# Altium PCB ABS.PcbDoc
Units mil, origin at the board's own origin, x right, y up, seen from the top; angles counter-clockwise.
Board outline 2450 x 2365 mil, 2 copper layers (Top Layer, Bottom Layer); 13 components, 11 nets, 48 pads, 0 vias.
Unrouted connection lines stored in the file: 1.
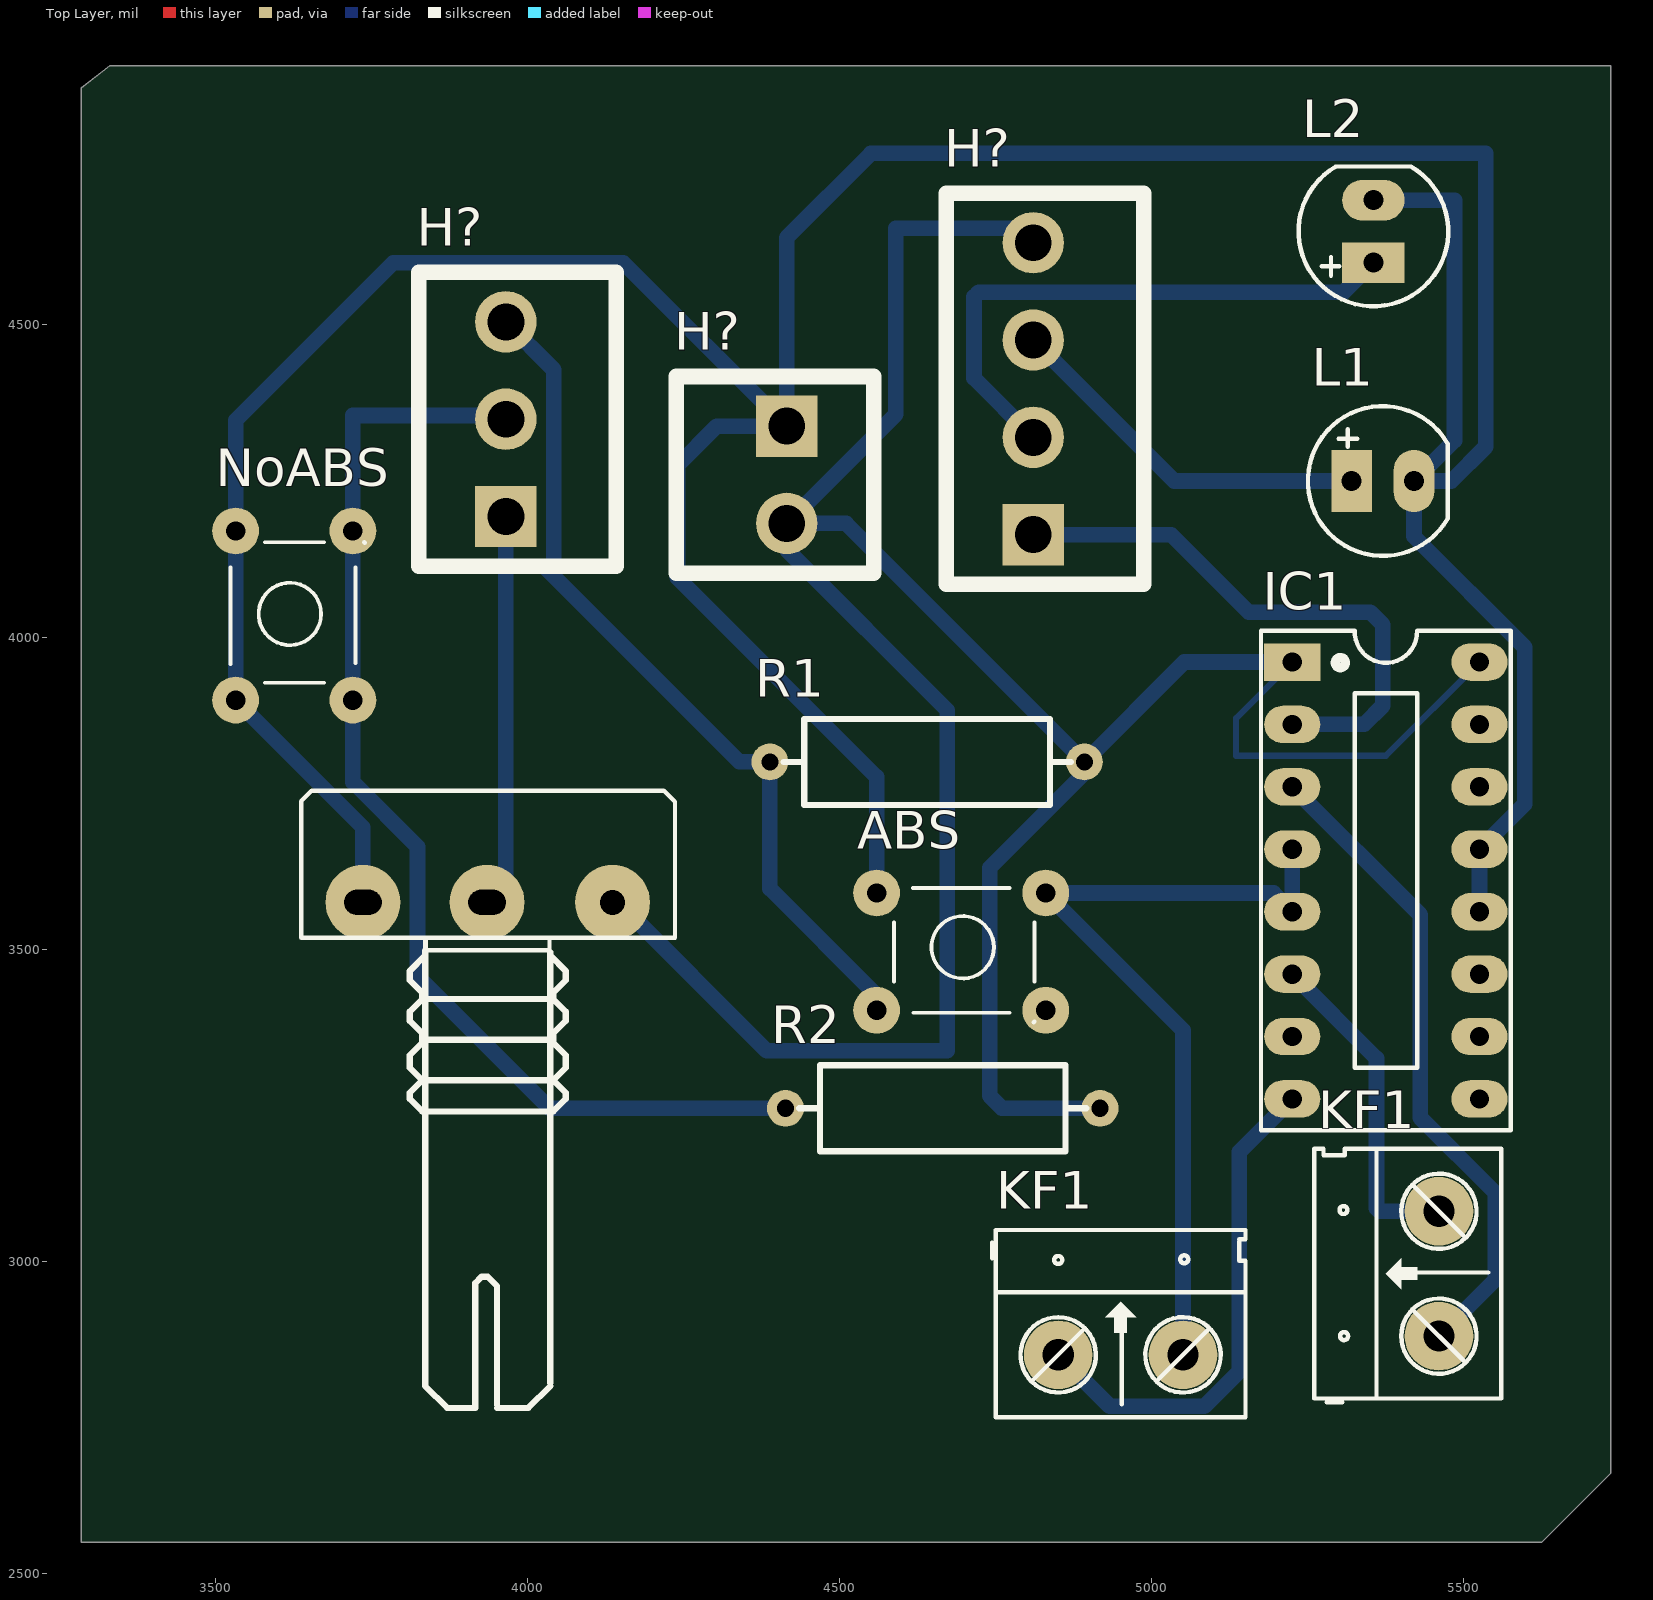
[diagram p0: Top Layer view]
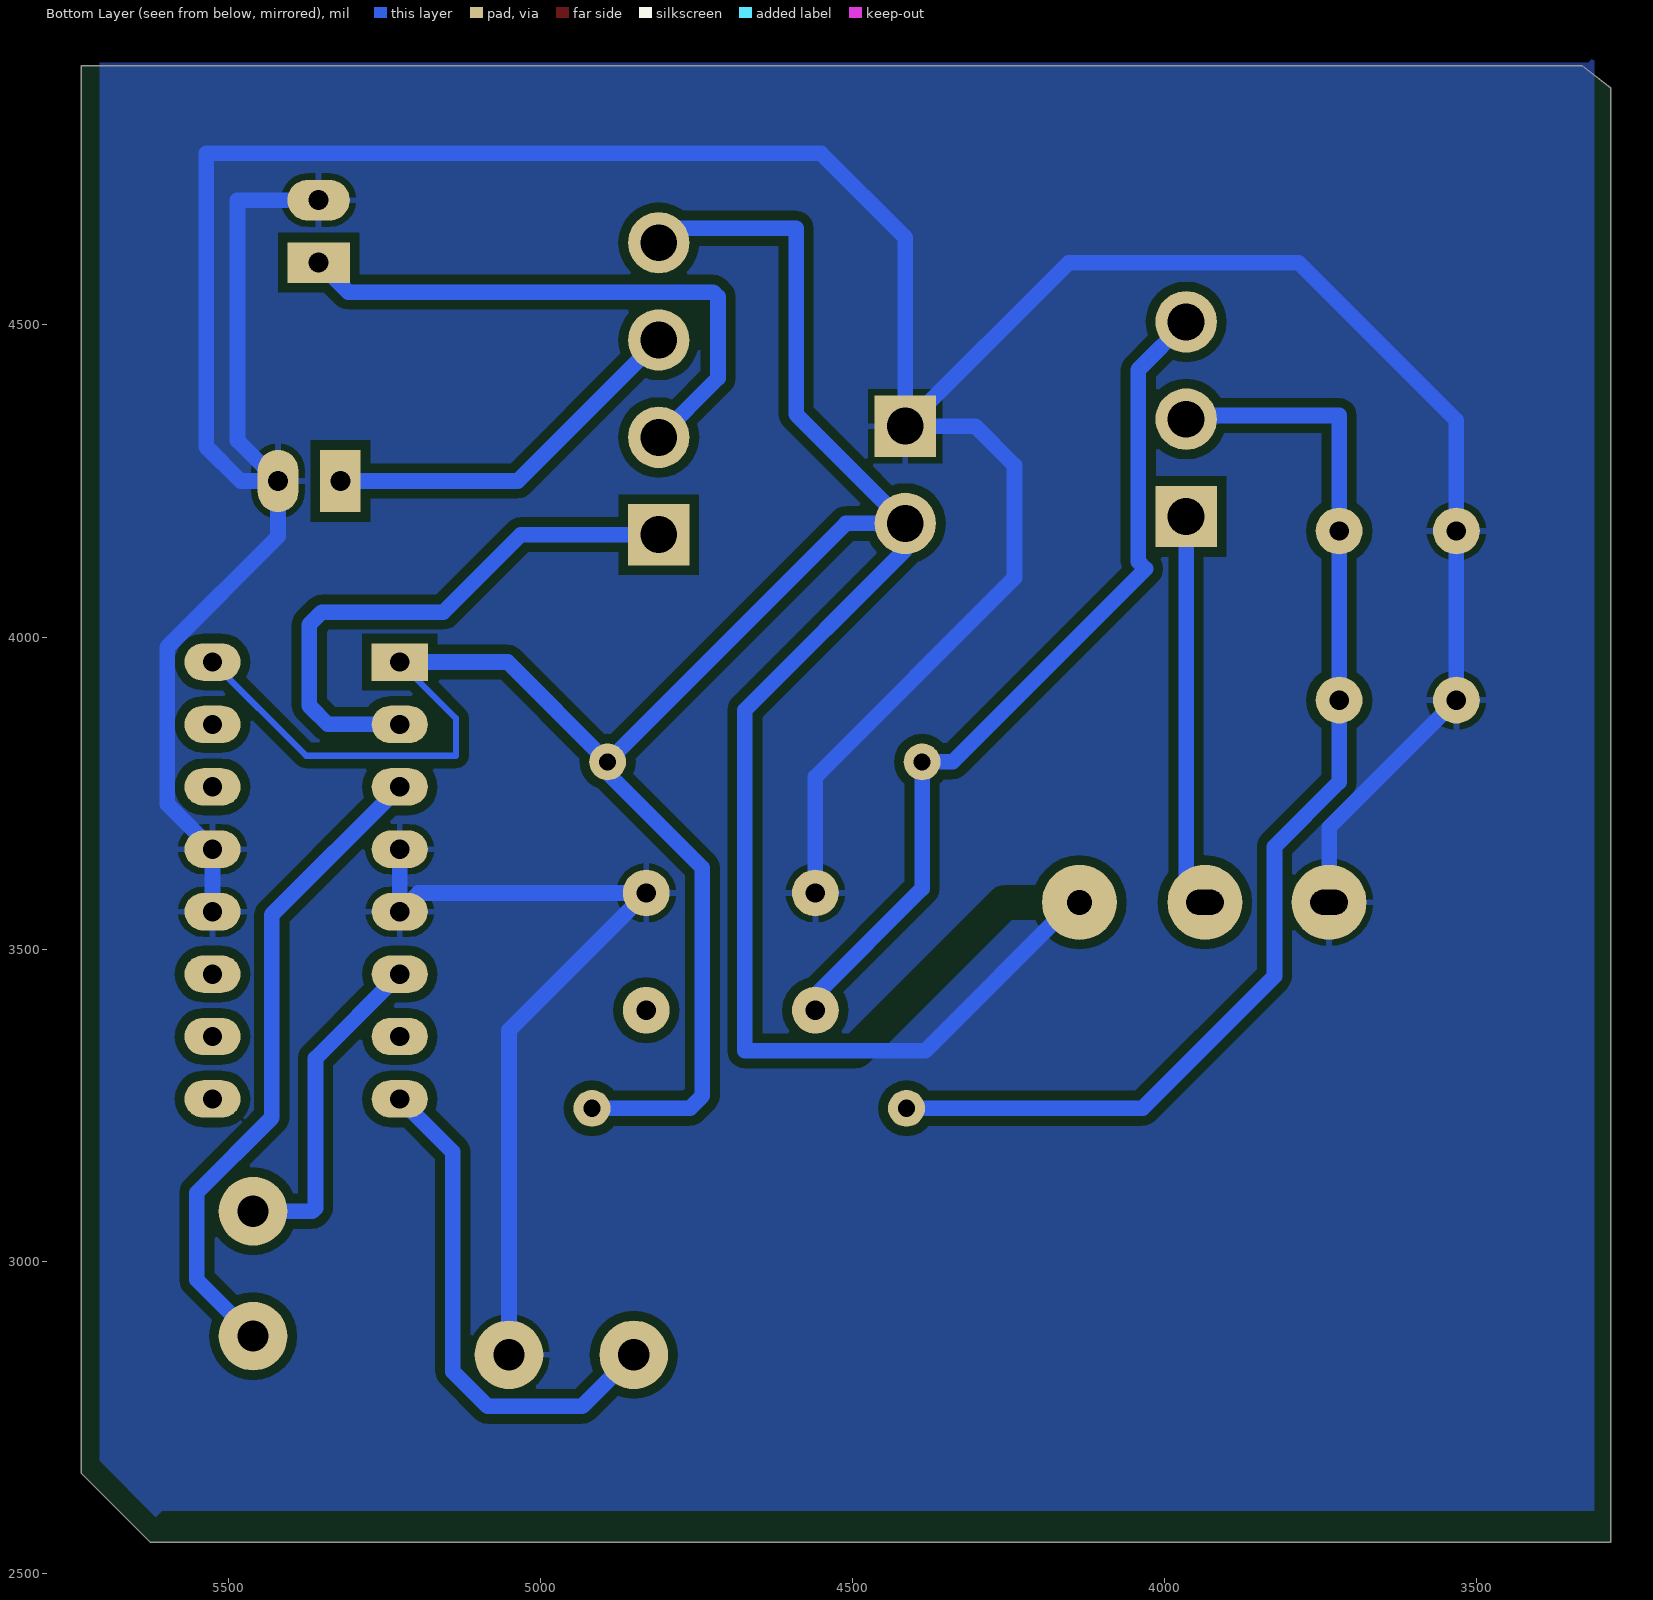
[diagram p1: Bottom Layer view, seen from below]
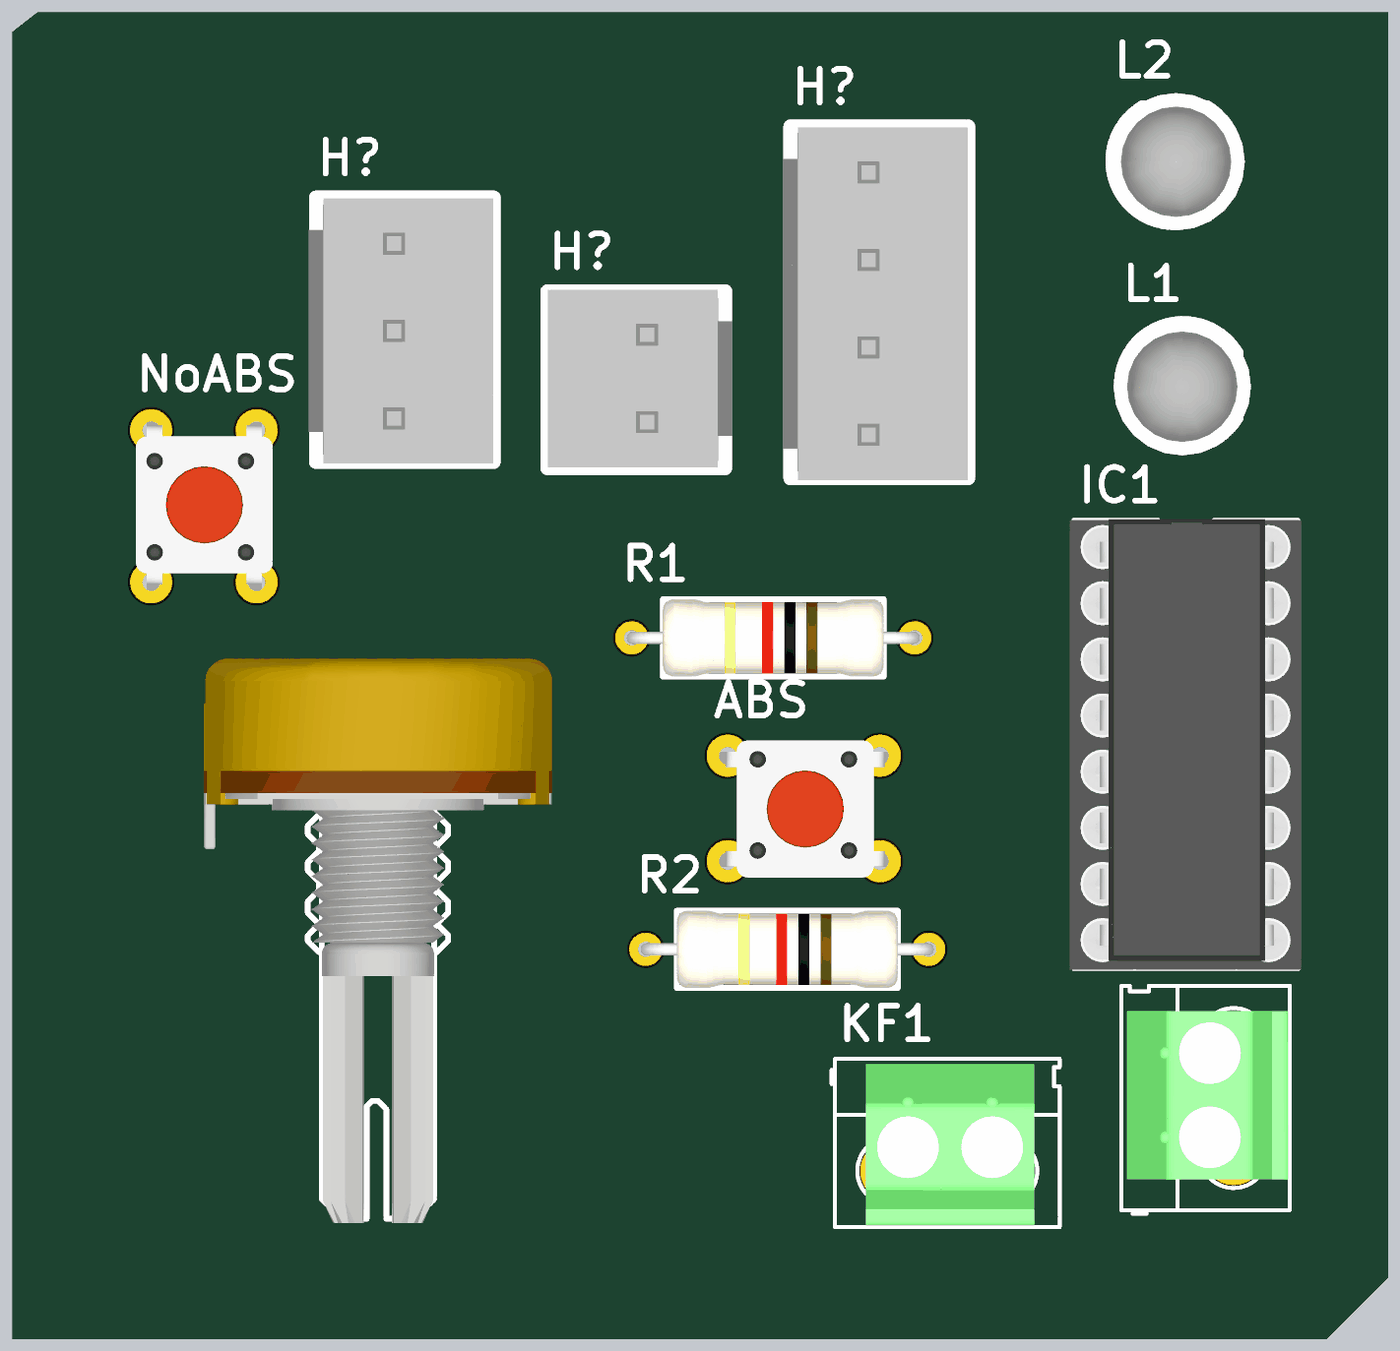
[diagram p2: 3D render of the assembled board from above, using the file's embedded part models]

## Layer stack, top to bottom
Top Solder: solder mask 0.4, Solder Resist, Dk 3.5
Top Layer: signal copper 1.4
Dielectric 1: dielectric 12.6, FR-4, Dk 4.8
Bottom Layer: signal copper 1.4
Bottom Solder: solder mask 0.4, Solder Resist, Dk 3.5

## Board outline
3330,4915 5735,4915 5735,2660 5625,2550 3285,2550 3285,4880

## Design rules (kind name [scope] priority, off if disabled: settings)
Clearance [All] p1: gap=15 ignorepadtopadclearanceinfootprint=FALSE
PolygonConnect [All] p1: connectstyle=Relief reliefconductorwidth=10 reliefentries=4 polygonreliefangle="90 Angle" airgapwidth=10
RoomDefinition ABS_ngli [InComponentClass('ABS_ngli')] p1: confinementstyle=ConfineIn formatcopy=TRUE lockcomponents=FALSE outline 7560,1005 12025,1005 12025,3140 7560,3140
RoutingVias [All] p1: holewidth=28 width=50 viastyle="Through Hole" minholewidth=28 minwidth=50 maxholewidth=28 maxwidth=50
SolderMaskExpansion [All] p1: expansion=4 istentingtop=FALSE
Width [All] p1: maxlimit=80 minlimit=10 preferedwidth=10
30 further rules are at their usual default settings.

## Classes and differential pairs
component class ABS_ngli: ABS IC1 KF1 L1 L2 NoABS R1 R2

## Components (designator, comment, footprint, x,y, rotation, side; value= is the part's Value field where it differs from the comment)
ABS "N" "Nut Nhan 4 Chan Cam 6x6" 4572,3598 r0 top
H? "power_1" VH3.96M-2 4415,4260 r270 top
H? "sensor_L" VH3.96M-3 3965,4271.14 r90 top
H? "control" VH3.96M-4 4810,4242.05 r90 top
IC1 "PT2248 DIP" DIP16 5225,3960 r270 top
KF1 "12v" "Con 2 KF301 5.08" 4850,2850 r0 top
KF1 "Motor" "Con 2 KF301 5.08" 5460,2880 r90 top
L1 "LED NoABS" LED-5MM-WHITE 5370,4250 r0 top
L2 "LED ABS" LED-5MM-WHITE 5355,4650 r90 top
NoABS "" "Nut Nhan 4 Chan Cam 6x6" 3524,3912 r90 top
R1 "10k" "tro vach 1/2w" 4640,3800 r180 top
R2 "10k" "tro vach 1/2w" 4665,3245 r180 top
? "10K" "Bien Tro Volume Don" 3736,3575 r0 top locked

## Footprints (in the part's own frame and the unit in brackets; to place one, negate y for a bottom-side part, rotate by r counter-clockwise, add the part's x,y. Pads: shape width x height; smd on the part's side, far side on the other; paste and mask are expansions set on the pad)
"Bien Tro Volume Don" [mil] "Volume control single"
  round 120 hole 40 slot 60 at 0 deg: 1(0,0) 2(199,0)
  round 120 hole 40: 3(400,0)
  silkscreen extent -99,-810 500,179, body extent -110,-818 510,188, height 839
"Con 2 KF301 5.08" [mil]
  round 110 hole 50: 1(0,0) 2(200,0)
  silkscreen extent -106,-100 300,200, body extent -45,-97 255,190, height 335
DIP16 [mil] "16 PIN, W 300mil, Pin to pin 100mil"
  rect 60x90 hole 31: 1(0,0)
  oval 60x90 hole 31: 2(100,0) 3(200,0) 4(300,0) 5(400,0) 6(500,0) 7(600,0) 8(700,0) 9(700,300) 10(600,300) 11(500,300) 12(400,300) 13(300,300) 14(200,300) 15(100,300) 16(0,300)
  silkscreen extent -50,-50 750,350, body extent -52,-57 752,356, height 299
LED-5MM-WHITE [mil] "LED 2 PIN, 5 ly , Only colour, pin to pin 110mil"
  rect 65x100 hole 32: 1(-50,0)
  oval 65x100 hole 32: 2(50,0)
  silkscreen extent -120,-120 104,120, body extent -124,-125 121,120, height 340
"Nut Nhan 4 Chan Cam 6x6" [mil] "SW button 4pin, 250 x250 mil"
  round 75 hole 31: 1(-13,-8) 1(258,-8) 2(-13,-196) 2(258,-196)
  silkscreen extent 15,-215 240,0, body extent -31,-225 281,19, height 276
"tro vach 1/2w" [mm]
  round 1.5 hole 0.7: 1(-6.4,0) 2(6.4,0)
  silkscreen extent -5.84,-1.75 5.84,1.75, body extent -6.62,-1.75 6.62,1.75, height 3.5
VH3.96M-2 [mm]
  rect 2.5x2.5 hole 1.5: 1(-1.98,0)
  round 2.5 hole 1.5: 2(1.98,0)
  silkscreen extent -4,-4.5 4,3.54, body extent -4.08,-4.49 3.96,3.88, height 10.26
VH3.96M-3 [mm]
  rect 2.5x2.5 hole 1.5: 1(-1.98,0)
  round 2.5 hole 1.5: 2(1.98,0) 3(5.94,0)
  silkscreen extent -4,-4.5 7.96,3.54, body extent -4.08,-4.49 7.92,3.88, height 10.26
VH3.96M-4 [mm]
  rect 2.5x2.5 hole 1.5: 1(-1.98,0)
  round 2.5 hole 1.5: 2(1.98,0) 3(5.94,0) 4(9.9,0)
  silkscreen extent -4,-4.5 11.92,3.54, body extent -4.08,-4.49 11.88,3.88, height 10.26

## Part data
ABS NoABS: library part "Nut Nhan 4 Chan Cam 6x6", "Nut Nhan 4 Chan 6x6mm", Ma_Hang=MH004584, Ten="Nút Nh?n 4 Chân 6x6x5MM DIP"
H?: library part "Header 2P VH3.96 Duc Thang", "C?m", Chung_Loai=C?m, Don_Vi=Con, Ma_Hang=MH001283, Ten_Linh_Kien="Header 2P XH2.54-2P Ð?c Th?ng"
H?: library part "Header 3P VH3.96 Duc Thang", "C?m", Chung_Loai=C?m, Don_Vi=Con, Ma_Hang=MH001292, Ten_Linh_Kien="Header 3P XH2.54-3P Ð?c Th?ng"
H?: library part "Header 4P VH3.96 Duc Thang", "C?m", Chung_Loai=C?m, Don_Vi=Con, Ma_Hang=MH001285, Ten_Linh_Kien="Header 4P XH2.54-4P Ð?c Th?ng"
IC1: "C?m", Chung_Loai=C?m, Don_Vi=Con, Ma_Hang=MH002843, Ten_Linh_Kien="PT2248 DIP16"
KF1 KF1: library part "CON 2 KF301", "C?m", Chung_Loai=C?m, Don_Vi=Con, Ma_Hang=MH000987, Ten_Linh_Kien="CON 2 KF301-2P 5.08MM Xanh Dýõng"
L1 L2: library part "LED 5mm Trang", "C?m", Chung_Loai=C?m, Don_Vi=Con, Ma_Hang=MH008983, Ten_Linh_Kien="Led 5MM Tr?ng Ð?c (1000c)"
R1 R2: library part "Tro Vach 1/2W 5% 10k", "C?m", Chung_Loai=C?m, Don_Vi=Con, Ma_Hang=MH006206, So_Chan=2, Ten_Linh_Kien="Tr? 5% 1/2w 10k"
?: library part "Triet Ap Don 10k", "C?m", Chung_Loai=C?m, Don_Vi=Con, Ma_Hang=MH001417, Ten_Linh_Kien="Tri?t Áp Ðõn B10K"

## Nets (pads, with @x,y where several pads share a name; then routed paths per layer and width w, separated by ;. In a path a pad name is that pad's centre, name@x,y a point inside that pad or via, vN(x,y) a via of type N, cw(c..) or ccw(c..) an arc to the next point about the centre after c; other vN are vias at no path point)
+5: ?.3 H?.2@4415,4182.05 H?.4 IC1.1 IC1.16 R1.1 R2.1 | length 4818.3
  Bottom Layer w10: IC1.1 5135,3870 5135,3810 5375,3810 IC1.16
  Bottom Layer w25: ?.3 4145,3575 4383,3337 4672,3337 4672,3883 4415,4140 H?.2@4415,4182.05 ; H?.4 4786.81,4655 4590,4655 4590,4357.05 H?.2@4415,4182.05 ; R2.1 4760,3245 4740,3265 4740,3630 4891.97,3781.97 R1.1 ; IC1.1 5051.97,3960 R1.1 ; H?.2@4415,4182.05 4509.92,4182.05 R1.1
GND: ?.1 ABS.1 H?.1@4415,4337.95 IC1.4 IC1.5 IC1.12 IC1.13 KF1.2@5050,2850 L1.2 L2.2 NoABS.1 | length 7795.8
  Bottom Layer w25: ?.1 3736,3695 3532,3899 3532,4170 3532,4347 3785,4600 4152.95,4600 H?.1@4415,4337.95 ; ABS.1@4559,3590 4559,3776 4240,4095 4240,4275 4302.95,4337.95 H?.1@4415,4337.95 ; KF1.2@5050,2850 5050,3370 4830,3590 5195,3590 IC1.5 IC1.4 ; L2.2 5485,4700 5485,4315 L1.2 ; IC1.12 IC1.13 5597.5,3732.5 5597.5,3983.82 5420,4161.32 L1.2 ; H?.1@4415,4337.95 4415,4640 4550,4775 5535,4775 5535,4305 5480,4250 L1.2
Net_2: ?.2 H?.1@3965,4193.19 | length 630.6
  Bottom Layer w25: ?.2 3965,3605 H?.1@3965,4193.19
NetABS_2: ABS.2 H?.3@3965,4505 R1.2 | length 1387.4
  Bottom Layer w25: H?.3@3965,4505 4041.71,4428.29 4041.71,4120.87 4030,4109.16 4339.16,3800 R1.2 4388.03,3596.97 4559,3426 ABS.2@4559,3402
NetH?_1: H?.1@4810,4164.09 IC1.2 | length 907.1
  Bottom Layer w25: H?.1@4810,4164.09 5030.91,4164.09 5155,4040 5350,4040 5370,4020 5370,3890 5340,3860 IC1.2
NetH?_2: H?.2@3965,4349.09 NoABS.2 R2.2 | length 1866
  Bottom Layer w25: H?.2@3965,4349.09 3959.09,4355 3720,4355 3720,4170 3720,3899 3720,3767.57 3823.5,3664.07 3823.5,3456.5 4035,3245 R2.2
NetH?_2: H?.2@4810,4320 L2.1 | length 927.1
  Bottom Layer w25: H?.2@4810,4320 4715,4415 4715,4545 4722.62,4552.62 5307.62,4552.62 L2.1
NetH?_3: H?.3@4810,4475.91 L1.1 | length 603.6
  Bottom Layer w25: H?.3@4810,4475.91 5035.91,4250 L1.1
NetIC1_3: IC1.3 KF1.1@5460,2880 | length 1051.9
  Bottom Layer w25: IC1.3 5430,3555 5430,3230 5550,3110 5550,2970 KF1.1@5460,2880
NetIC1_6: IC1.6 KF1.2@5460,3080 | length 533
  Bottom Layer w25: IC1.6 5360,3325 5360,3085 5365,3080 KF1.2@5460,3080
NetIC1_8: IC1.8 KF1.1@4850,2850 | length 819.2
  Bottom Layer w25: KF1.1@4850,2850 4932.5,2767.5 5084.17,2767.5 5140,2823.33 5140,3175 IC1.8
pads on no net: IC1.7 IC1.9 IC1.10 IC1.11 IC1.14 IC1.15

## Polygon pours and split planes (outlines as drawn)
GND on Bottom Layer "GND_L02_P006" (solid, pour order 6): 3310.79,4930.12 3320.79,4920.12 5705.79,4920.12 5705.79,2680.12 5615.79,2590.12 5605.79,2600.12 3310.79,2600.12

## Silkscreen, mask and mechanical layers (free items; w line width, h text height)
Mechanical 1:
  lines w47.24: 6965,1385 6975,1395 ; 3285,2550 3285,4880 3330,4915 5735,4915 5735,2660 5625,2550 3285,2550